# Altium PCB CAR2.PcbDoc
Units mil, origin at the board's own origin, x right, y up, seen from the top; angles counter-clockwise.
Board outline 1397.98 x 964.91 mil, 2 copper layers (Top Layer, Bottom Layer); 47 components, 33 nets, 165 pads, 35 vias.
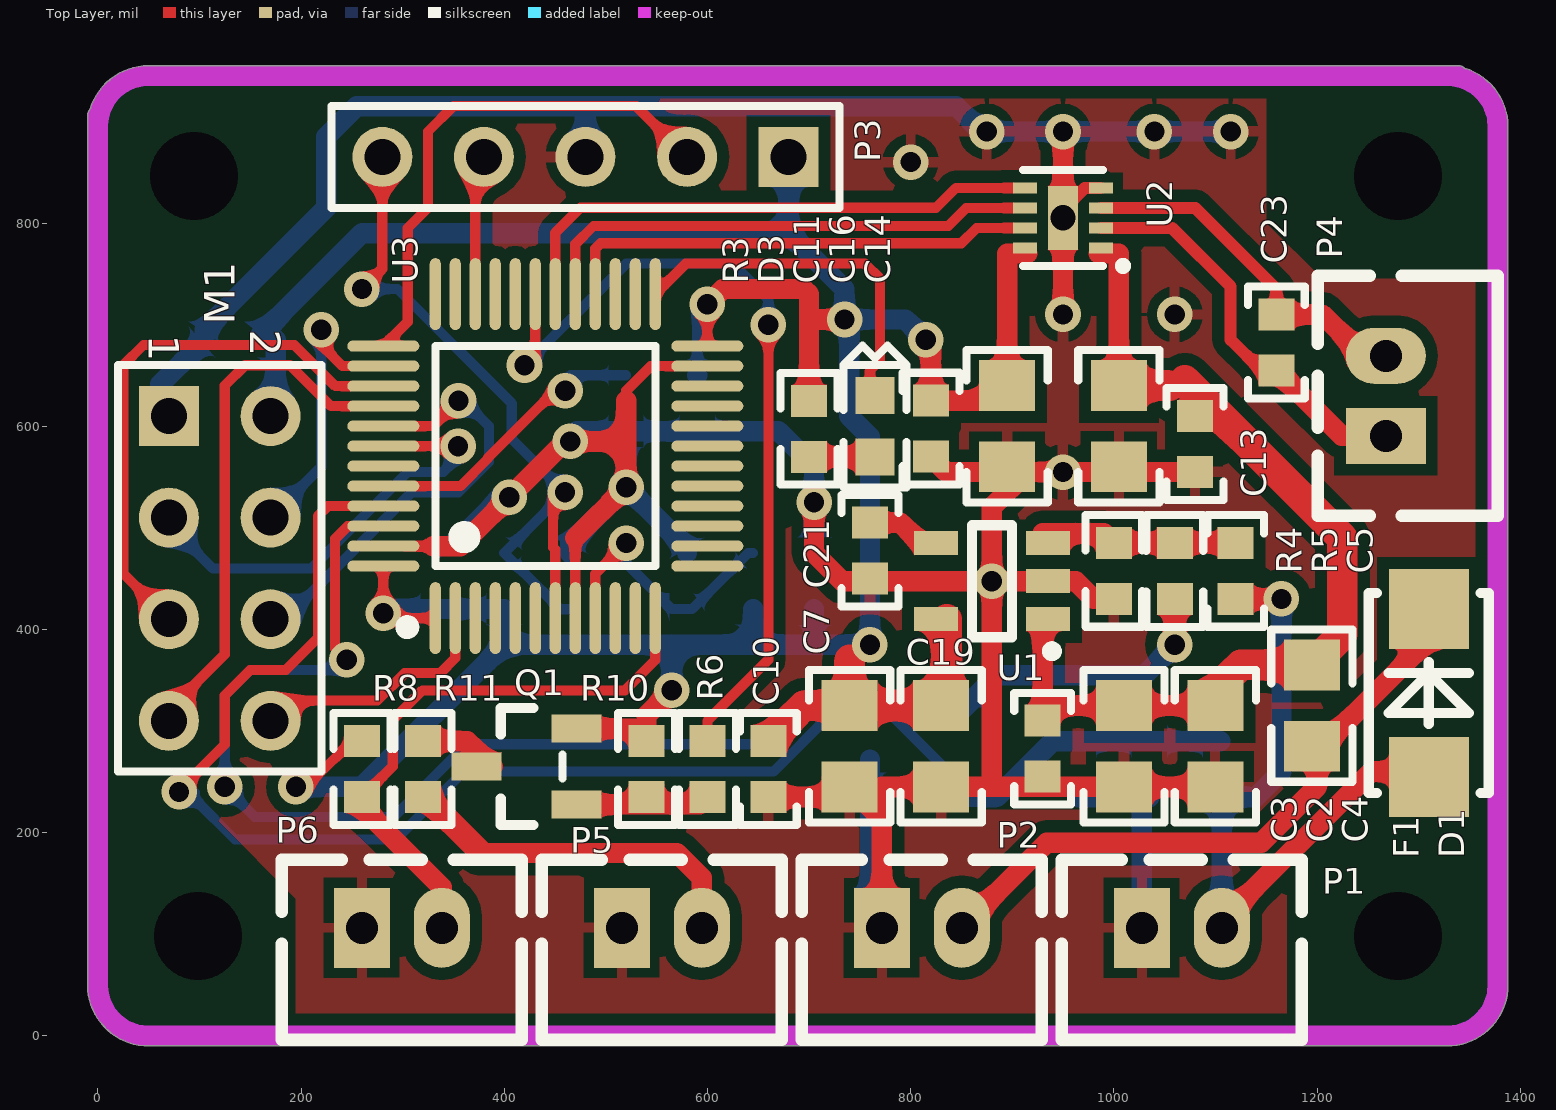
[diagram p0: Top Layer view]
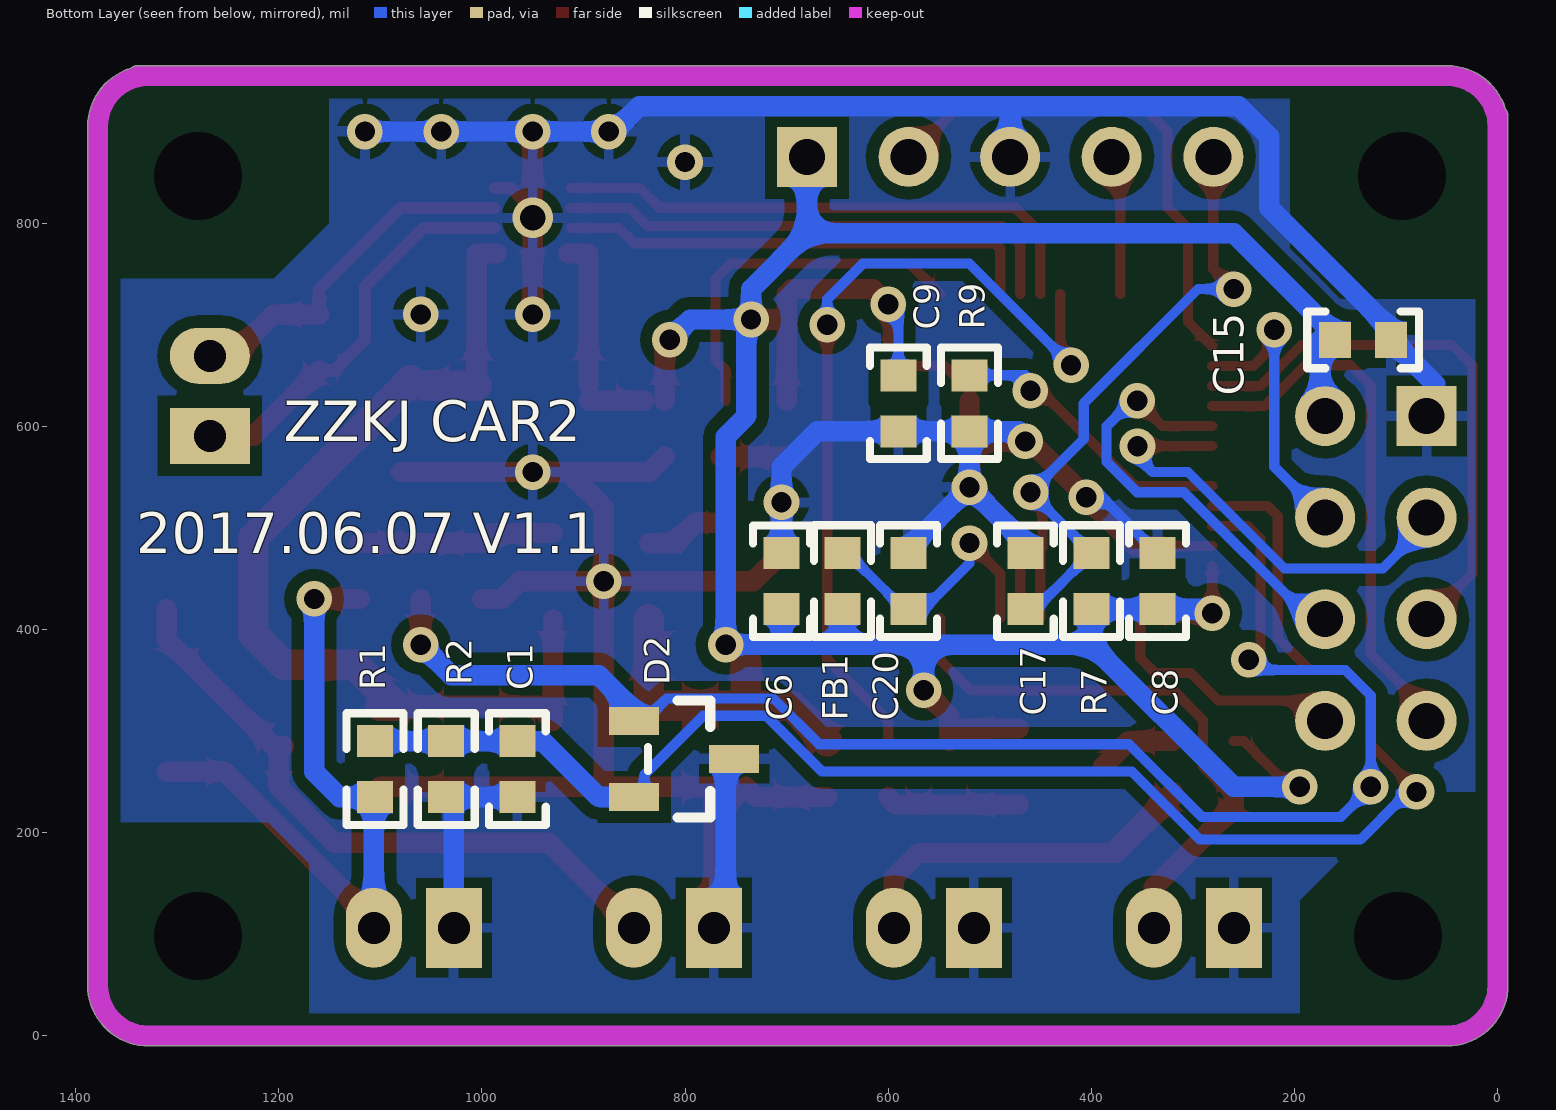
[diagram p1: Bottom Layer view, seen from below]

## Layer stack, top to bottom
Top Solder: solder mask 0.4, Solder Resist, Dk 3.5
Top Layer: signal copper 1.4
Dielectric 1: dielectric 12.6, FR-4, Dk 4.8
Bottom Layer: signal copper 1.4
Bottom Solder: solder mask 0.4, Solder Resist, Dk 3.5

## Board outline
-10.01,50 -10.01,905.51 cw(c0,905.51) -7.47,912.19 cw(c50,894.88) 50,954.9 1338.58,954.9 cw(c1338.58,944.88) 1345.26,952.35 cw(c1327.95,894.88) 1387.97,894.88 1387.97,50 cw(c1327.95,50) 1327.95,-10.01 50,-10.01 cw(c50,50)

## Design rules (kind name [scope] priority, off if disabled: settings)
Clearance Clearance_1 [InPolygon] p1: gap=12
Clearance [All] p2: gap=7
PolygonConnect [All] p1: connectstyle=Relief reliefconductorwidth=10 reliefentries=4 polygonreliefangle="90 Angle" airgapwidth=10
RoutingVias [All] p1: holewidth=22 width=40 viastyle="Through Hole" minholewidth=20 minwidth=30 maxholewidth=30 maxwidth=50
SilkToSolderMaskClearance [IsPad] p1: minsilkscreentomaskgap=4 clearancetoexposedcopper=TRUE
SolderMaskExpansion [All] p1: expansion=4
Width [All] p1: maxlimit=50 minlimit=10 preferedwidth=20 minimp=50.000000 maximp=50.000000 favimp=50.000000
29 further rules are at their usual default settings.

## Components (designator, comment, footprint, x,y, rotation, side; value= is the part's Value field where it differs from the comment)
C1 "100nF" C0603 965,234.88 r90 bottom
C2 "10uF" C0805 1010,285 r270 top
C3 "100nF" C0603 930,255 r90 top
C4 "10uF" C0805 1100,285 r270 top
C5 "100nF" C0603 1120,485.12 r270 top
C6 "100nF" C0603 705,419.88 r90 bottom
C7 "10uF" C0805 740,285 r270 top
C8 "100nF" C0603 335,475.12 r270 bottom
C9 "100nF" C0603 590,595 r90 bottom
C10 "100nF" C0603 660,290.12 r270 top
C11 "100nF" C0603 820,570 r90 top
C13 "100nF" C0603 1080,554.88 r90 top
C14 "10uF" C0805 1005,600 r90 top
C15 "100nF" C0603 105,685 r0 bottom
C16 "10uF" C0805 895,600 r90 top
C17 "100nF" C0603 465,475 r270 bottom
C19 "10uF" C0805 830,285 r90 top
C20 "100nF" C0603 580,475.12 r270 bottom
C21 "100nF" C0603 760,505 r270 top
C23 "100nF" C0603 1160,710 r270 top
D1 "SS14" LC-SMA(DO-214AC)_S2 1310,337.32 r270 top
D2 "PESD3V3L2BT" LC-SOT-23(SOT-23-3) 800.79,272.4 r0 bottom
D3 "LEDV1" LC-0603_LED_S4 765,600 r270 top
F1 "SMD0805-110" R0805 1195,325 r90 top
FB1 "GZ1608D601TF" R0603 645,420 r90 bottom
M1 "NRF2401" HDR2X4 70,610 r270 top
P1 "5V IN" PH-2Y 1027.56,106.3 r0 top
P2 "BAT" PH-2Y 771.65,106.3 r0 top
P3 "SWD" HDR1X5 680,865 r180 top
P4 "Motor" PH-2Y 1267.72,590.55 r90 top
P5 "TX" PH-2Y 515.75,106.3 r0 top
P6 "RX" PH-2Y 259.84,106.3 r0 top
Q1 "Si2301CDS" LC-SOT-23(SOT-23-3) 422.13,265 r0 top
R1 "10K" R0603 1105,290 r270 bottom
R2 "10K" R0603 1035,234.88 r90 bottom
R3 "1.5K" R0603 700,569.88 r90 top
R4 "100K" R0603 1000,430 r90 top
R5 "10K" R0603 1060,429.88 r90 top
R6 "1K" R0603 600,235 r90 top
R7 "100K" R0603 400,475.12 r270 bottom
R8 "100K" R0603 260,290.12 r270 top
R9 "10K" R0603 520,595 r90 bottom
R10 "100K" R0603 540,290.12 r270 top
R11 "100" R0603 320,290.12 r270 top
U1 "MIC5205-3.3YM5" LC-SOT-23-5 880,447.4 r0 top
U2 "DRV8837DSGR" "LC-WSON-8_2x2mm - DRV8837" 950,805 r90 top
U3 "STM32F051C8T6" LC-LQFP-48_7x7x05P 440.47,570.55 r0 top

## Footprints (in the part's own frame and the unit in brackets; to place one, negate y for a bottom-side part, rotate by r counter-clockwise, add the part's x,y. Pads: shape width x height; smd on the part's side, far side on the other; paste and mask are expansions set on the pad)
C0603 [mm] "Chip Capacitor, Body 1.6x0.8mm, IPC High Density"
  rect 0.8x0.9 smd: 1(0,0) 2(1.4,0)
  silkscreen extent -0.7,-0.71 2.1,0.71, body extent -0.18,-0.48 1.57,0.47, height 1.3
C0805 [mil] "Chip Capacitor, Body 2.0x1.3mm, IPC High Density"
  rect 50x55.12 smd: 1(-40,0) 2(40,0)
  silkscreen extent -75,-40 75,40, body extent -43,-30 43,30, height 55
HDR1X5 [mm] "Connector; Header; 5 Position"
  rect 1.5x1.5 hole 0.9: 1(0,0)
  round 1.5 hole 0.9: 2(2.54,0) 3(5.08,0) 4(7.62,0) 5(10.16,0)
  silkscreen extent -1.27,-1.27 11.43,1.27
HDR2X4 [mm] "Connector; Header; 4x2 Position"
  rect 1.5x1.5 hole 0.9: 1(0,0)
  round 1.5 hole 0.9: 2(0,2.54) 3(2.54,0) 4(2.54,2.54) 5(5.08,0) 6(5.08,2.54) 7(7.62,0) 8(7.62,2.54)
  silkscreen extent -1.27,-1.27 8.89,3.81
LC-0603_LED_S4 [mm]
  rect 0.93x0.98 smd: A(0.77,0) K(-0.77,0)
  silkscreen extent -2.01,-0.79 1.54,0.79, body extent -0.8,-0.4 0.8,0.4, height 0.6
LC-LQFP-48_7x7x05P [mm]
  oval 0.28x1.8 smd mask+0.051: 1(-2.75,-4.05) 2(-2.25,-4.05) 3(-1.75,-4.05) 4(-1.25,-4.05) 5(-0.75,-4.05) 6(-0.25,-4.05) 7(0.25,-4.05) 8(0.75,-4.05) 9(1.25,-4.05) 10(1.75,-4.05) 11(2.25,-4.05) 12(2.75,-4.05) 25(2.75,4.05) 26(2.25,4.05) 27(1.75,4.05) 28(1.25,4.05) 29(0.75,4.05) 30(0.25,4.05) 31(-0.25,4.05) 32(-0.75,4.05) 33(-1.25,4.05) 34(-1.75,4.05) 35(-2.25,4.05) 36(-2.75,4.05)
  oval 1.8x0.28 smd mask+0.051: 13(4.05,-2.75) 14(4.05,-2.25) 15(4.05,-1.75) 16(4.05,-1.25) 17(4.05,-0.75) 18(4.05,-0.25) 19(4.05,0.25) 20(4.05,0.75) 21(4.05,1.25) 22(4.05,1.75) 23(4.05,2.25) 24(4.05,2.75) 37(-4.05,2.75) 38(-4.05,2.25) 39(-4.05,1.75) 40(-4.05,1.25) 41(-4.05,0.75) 42(-4.05,0.25) 43(-4.05,-0.25) 44(-4.05,-0.75) 45(-4.05,-1.25) 46(-4.05,-1.75) 47(-4.05,-2.25) 48(-4.05,-2.75)
  silkscreen extent -3.6,-4.42 2.75,2.75
LC-SMA(DO-214AC)_S2 [mm]
  rect 2x2 smd: 1(2.1,0) 2(-2.1,0)
  silkscreen extent -2.5,-1.5 2.5,1.5
LC-SOT-23(SOT-23-3) [mm]
  rect 1.25x0.7 smd: 1(1.25,-0.95) 2(1.25,0.95) 3(-1.25,0)
  silkscreen extent -0.65,-1.46 0.9,1.46, body extent -1.5,-1.5 1.5,1.5, height 1.3
LC-SOT-23-5 [mm]
  rect 1.1x0.6 smd: 1(1.4,-0.95) 2(1.4,0) 3(1.4,0.95) 4(-1.4,0.95) 5(-1.4,-0.95)
  silkscreen extent -0.5,-1.87 1.63,1.4
"LC-WSON-8_2x2mm - DRV8837" [mm]
  rect 1.6x0.762 smd mask+0.051: 0(0,0)
  rect 0.28x0.6 smd mask+0.051: 1(-0.75,-0.95) 2(-0.25,-0.95) 3(0.25,-0.95) 4(0.75,-0.95) 5(0.75,0.95) 6(0.25,0.95) 7(-0.25,0.95) 8(-0.75,0.95)
  silkscreen extent -1.3,-1.6 1.2,1
PH-2Y [mm]
  rect 1.4x2 hole 0.8: 1(0,0)
  oval 1.4x2 hole 0.8: 2(2,0)
  silkscreen extent -2,-2.8 4,1.7
R0603 [mm] "Chip Capacitor, Body 1.6x0.8mm, IPC High Density"
  rect 0.8x0.9 smd: 1(0,0) 2(1.4,0)
  silkscreen extent -0.7,-0.71 2.1,0.71, body extent -0.18,-0.48 1.57,0.47, height 1.3
R0805 [mil] "Chip Capacitor, Body 2.0x1.3mm, IPC High Density"
  rect 50x55.12 smd: 1(-40,0) 2(40,0)
  silkscreen extent -75,-40 75,40, body extent -43,-30 43,30, height 55

## Part data
C1 C3 C5 C8 C9 C10 C11 C13 C14 C15 C16 C17 C19 C20 C21 C23: library part Cap, "Capacitor"
C2 C4 C6 C7: library part CAP, "Capacitor"
D1: library part DIODE, "Diode"
D2: library part ZENER2, "TVS"
D3: library part LED2, "Typical RED, GREEN, YELLOW, AMBER GaAs LED"
F1: library part "Fuse 2", "Fuse"
FB1: library part INDUCTOR1
P1 P2 P4 P5 P6: library part "Header 2", "Header, 2-Pin"
P3: library part "Header 5", "Header, 5-Pin"
Q1: library part BSH201, "P-channel Enhancement Mode MOSFET"
R1 R2 R3 R4 R5 R6 R7 R8 R9 R10 R11: library part Res2, "Resistor"
U1: library part MIC5205, "150mA Low-Noise LDO Regulator"
U2: library part DRV883x, "Low-Voltage H-Bridge Driver"
U3: library part STM32F51C8T6, "STM32 ARM-based 32-bit MCU with 64 Kbytes Flash, 48-pin LQFP, Industrial Temperature"

## Free pads (board coordinates)
  round 0 hole 86.61 unplated: 1(98.43,98.43) 2(94.49,846.46) 3(1279.53,846.46) 4(1279.53,98.43)

## Via types
v1: diameter 35, hole 20, Top Layer to Bottom Layer, tented both sides, 32 vias
v2: diameter 35, hole 20, Top Layer to Bottom Layer, 2 vias
v3: diameter 30/40 (per signal layer), hole 25, Top Layer to Bottom Layer, 1 vias

## Nets (pads, with @x,y where several pads share a name; then routed paths per layer and width w, separated by ;. In a path a pad name is that pad's centre, name@x,y a point inside that pad or via, vN(x,y) a via of type N, cw(c..) or ccw(c..) an arc to the next point about the centre after c; other vN are vias at no path point)
BOOT0: R9.2 U3.44 | length 290.6
  Top Layer w10: U3.44 356.96,541.02 384.11,568.17 384.11,569.11 450,635 v1(460,635)
  Bottom Layer w10: v1(460,635) 460,645 465.12,650.12 R9.2
GND: C1.1 C2.2 C3.1 C4.2 C6.2 C7.2 C8.1 C9.1 C10.2 C11.1 C13.1 C14.1 C15.1 C16.1 C17.1 C19.1 C20.1 C21.2 D2.3 M1.1 P1.1 P2.1 P3.3 P5.1 P6.1 R2.1 R4.1 R9.1 U1.2 U2.0 U2.4 U3.8 U3.23 U3.47 | length 4709.6
  Top Layer w10: U3.47 330,481.97 ; U3.8 470,490 ; 520,625 520,635 544.13,659.13 U3.23
  Top Layer w12: U2.0@950,813.15 971.38,834.53 U2.4
  Top Layer w20: 330,481.97 356.97,481.97 v1(405,530) v1@462.5,587.5 ; v1(465,585) 520,585 ; 470,490 v1(520,540) 520,585 ; 520,625 520,585 ; C10.2 730,235 C7.2 771.65,213.35 ; v1(705,525) 705,475 732.6,447.4 v2(880,447.4) ; P2.1 771.65,213.35 ; C11.1 835.12,554.88 C16.1@914.88,554.88 ; v1(950,710) v3(950,805) 950,813.15 v1(950,890) ; R4.1 980,430 962.6,447.4 v2(880,447.4) ; C13.1 v1(950,554.88) C16.1@914.88,554.88 ; C4.2 C2.2 880,245 ; 771.65,213.35 771.65,245 C19.1 880,245 ; 880,245 v2(880,447.4) ; v2(880,447.4) 880,520 C16.1@914.88,554.88
  Bottom Layer w10: C8.1 389.88,530 v1(405,530)
  Bottom Layer w20: M1.1@61.42,611.81 61.42,641.42 C15.1 105,695 225,815 225,885 255,915 485,915 ; C17.1 465,485 v1(520,540) ; v1@471.21,595 R9.1 C9.1 670,595 705,560 v1(705,525) C6.2 ; P3.3 480,910 485,915 ; R9.1@520,580 v1(520,540) ; C20.1 580,480 v1(520,540) ; D2.3@760,272 760,117.95 P2.1 ; C1.1 R2.1@1027.56,234.88 ; P1.1 R2.1@1027.56,234.88 ; R2.1 R2.1@1027.56,234.88 ; v1(1115,890) v1(1040,890) v1(950,890) v1(875,890) 870,890 845,915 485,915
  other v1: 1060,710 800,860
IR_RX: P6.2 R8.2 U3.12 | length 573.8
  Top Layer w10: R8.2 290.28,265.28 290.28,310.84 319.45,340 518.89,340 548.74,369.85 U3.12
  Top Layer w20: R8.2 260,225 338.58,146.42 P6.2
IR_RX2: 
IR_TX: R6.2 U3.31 | length 830.1
  Top Layer w10: v1(420,660) 430.63,670.63 U3.31 ; R6.2 600,310 660,370 v1(660,700)
  Bottom Layer w10: v1(420,660) 520,760 625,760 660,725 v1(660,700)
LED: D3.K U3.25 | length 363.9
  Top Layer w10: U3.25 578.74,760 755,760 770,745 770,665 760,655 D3.K@760,625.12
MIN1: U2.6 U3.29 | length 506.5
  Top Layer w10: U3.29 470,779.04 487.96,797 837,797 854.84,814.84 U2.6
MIN2: U2.5 U3.30 | length 540.9
  Top Layer w10: U3.30 450.31,790.31 475,815 825,815 844.53,834.53 U2.5
MNSLEEP: U2.7 U3.28 | length 476.1
  Top Layer w10: U3.28 489.68,774.68 495,780 850,780 865.16,795.16 U2.7
NetC5_1: C5.1 R4.2 R5.2 U1.3 | length 194
  Top Layer w20: U1.3@930,494.8 990.32,494.8 R4.2 C5.1
NetC5_2: C5.2 D1.1 P1.2 R1.2 | length 685.9
  Top Layer w20: P1.2 1106.3,113.12 1253.18,260 D1.1@1310,260 ; C5.2 v2(1165,430)
  Bottom Layer w20: P1.2 1106.3,233.58 R1.2 1139.88,234.88 1165,260 v2(1165,430)
NetC20_2: C20.2 FB1.2 U3.9 | length 272.9
  Top Layer w10: U3.9 489.68,454.68 v1(520,485)
  Bottom Layer w10: v1(520,485) 520,465 565,420 C20.2 585,420 640.12,475.12 FB1.2
NetC21_1: C21.1 U1.4 | length 84.3
  Top Layer w20: C21.1 789.8,505 810,484.8 835.51,484.8 U1.4@835.2,485.12
NetC23_1: C23.1 P4.2 U2.3 | length 355.2
  Top Layer w12: U2.3 1080.16,814.84 1160,735 C23.1
  Top Layer w20: C23.1 1205,710 1245.71,669.29 P4.2
NetC23_2: C23.2 P4.1 U2.2 | length 395.8
  Top Layer w12: U2.2 1057.34,795.16 1115,737.5 1115,685 1145.12,654.88 C23.2
  Top Layer w20: C23.2 1224.33,590.55 P4.1
NetD3_A: D3.A R3.1 | length 65.1
  Top Layer w20: R3.1 764.8,569.88 D3.A
NetP5_2: P5.2 R11.2 | length 441.5
  Top Layer w20: R11.2 375,180 380,180 ; R11.2@320,240 380,180 ; P5.2 594.49,155.51 570,180 380,180
NetQ1_1: Q1.1 R6.1 R10.2 | length 131.7
  Top Layer w20: Q1.1 592.6,227.6 R6.1
NetQ1_3: Q1.3 R11.1 | length 79.1
  Top Layer w20: R11.1 363.54,290.12 Q1.3@388.66,265
NRST: C17.2 P3.5 R7.1 U3.7 | length 743.9
  Top Layer w10: v1(260,735) 280,755 P3.5 ; U3.7 450.31,478.57 448,480.89 448,523.12 v1(459.88,535)
  Bottom Layer w10: v1(260,735) 295,735 407.5,622.5 407.5,587.38 v1(459.88,535) R7.1 455.24,419.88 C17.2
PWR: D2.1 R5.1 U3.46 | length 1481.7
  Top Layer w10: v1(245,370) 233.59,381.41 233.59,489.39 245.86,501.65 U3.46
  Top Layer w20: v1(1060,385) R5.1
  Bottom Layer w10: v1(245,370) 235,360 150,360 125,335 v1(125,245) 154.5,215.5 291.46,215.5 362.96,287 667.96,287 712.96,332 818,332 D2.1@840,310
  Bottom Layer w20: D2.1@840,310 885,355 1030,355 v1(1060,385)
RF_CE: M1.3 U3.42 | length 444.4
  Top Layer w10: U3.42 v1(354.61,580.39)
  Bottom Layer w10: M1.3@61.42,511.81 113.23,460 210,460 305,555 340,555 354.61,569.61 v1(354.61,580.39)
RF_IRQ: M1.8 U3.2 | length 255
  Top Layer w10: M1.8 167.66,310 165.85,311.81 184.04,330 275,330 302,357 337,357 351.89,371.89 U3.2
SPI1_MISO: M1.7 U3.40 | length 535.5
  Top Layer w10: M1.7@61.42,311.81 125,375.39 125,640 145,660 189.24,660 229.48,619.76 U3.40
SPI1_MOSI: M1.6 U3.41 | length 439.6
  Top Layer w10: U3.41 330.08,600.08 v1@350,620
  Bottom Layer w10: M1.6@161.42,411.81 185.85,411.81 309.04,535 355,535 385,565 385,600 360,625 v1(355,625)
SPI1_NSS: M1.4 U3.38 | length 290.4
  Top Layer w10: v1(220,695) 220,680 240.87,659.13 U3.38
  Bottom Layer w10: M1.4 220,560 v1(220,695)
SPI1_SCK: M1.5 U3.39 | length 554.5
  Top Layer w10: M1.5@61.42,411.81 M1.5@64.8,415.2 ; M1.5 M1.5@64.8,415.2 ; U3.39 233.83,639.45 193.28,680 45,680 25,660 25,455 M1.5@64.8,415.2
SWCLK: P3.2 U3.37 | length 515.5
  Top Layer w10: U3.37 305,702.8 305,795 325,815 325,890 350,915 530,915 P3.2
SWDIO: P3.4 U3.34 | length 138.5
  Top Layer w10: U3.34 371.57,856.57 P3.4
VBAT: D1.2 F1.1 P2.2 | length 635.6
  Top Layer w20: P2.2 934.09,190 1145,190 1200,245 F1.1@1200,285 ; F1.1 F1.1@1200,285 ; D1.2 1310,390 1205,285 F1.1@1200,285
VBUS: C1.2 D2.2 R1.1 R2.2 U3.45 | length 1567.2
  Top Layer w10: v1@80,241.72 125,286.72 125,335 150,360 185,360 216.59,391.59 216.59,511.59 226.34,521.34 U3.45
  Bottom Layer w10: v1@95.5,239.5 95.5,232.78 135,193.28 293.28,193.28 360,260 665,260 720,315 782.03,315 840,257.03 D2.2@840,235
  Bottom Layer w20: D2.2@840,235 D2.2 885,235 940,290 C1.2 R2.2 R1.1
  other v1: 80,240
VCC3.3: C6.1 C7.1 C8.2 C9.2 C10.1 C11.2 C15.2 C16.2 C19.2 FB1.1 M1.2 P3.1 Q1.2 R3.2 R7.2 R8.1 R10.1 U1.5 U2.8 U3.1 U3.24 U3.48 | length 3431.8
  Top Layer w10: v1@195,235 250.12,290.12 R8.1 ; U3.48 v1(281.02,416.02) 285.94,411.1 U3.1 ; U3.24 v1(599.92,719.92)
  Top Layer w20: Q1.2 527.72,302.4 R10.1 540,315 v1(565,340) ; v1(599.92,719.92) 615,735 695,735 700,730 700,700 ; R3.2 700,700 ; v1(735,705) 705,705 700,700 ; v1(815,685) 820,680 C11.2 ; 840,625.12 C16.2@895,625.12 ; C16.2 895,770 U2.8@915,770
  Top Layer w30: C10.1 694.88,325 C7.1 ; 740,370 C7.1 ; U1.5@835.51,410 835.51,330.51 C19.2 C7.1
  Bottom Layer w10: C9.2 590,710 v1(599.92,719.92)
  Bottom Layer w20: C15.2 160.12,690.12 260,790 680,790 ; M1.2@173.23,600 161.42,611.81 175,625.39 C15.2@175,685 ; v1(195,245) 260,245 400,385 ; v1(281.02,416.02) 285,420 C8.2 R7.2 396.02,416.02 400,412.05 400,385 ; v1(565,340) 565,385 ; C9.2 C9.2@590.12,650 ; FB1.1 645,385 ; P3.1 680,790 ; C6.1 705,387.5 702.5,385 ; v1(815,685) 795,705 v1(735,705) ; 400,385 565,385 ; 565,385 645,385 ; 645,385 702.5,385 ; 680,790 735,735 v1(735,705) ; 702.5,385 v1(760,385) 760,589.72 739.72,610 739.72,700.28 v1(735,705)
VIN: C2.1 C3.2 C4.1 C13.2 C14.2 F1.2 U1.1 U2.1 | length 959.2
  Top Layer w20: U1.1@930,410 C3.2 944.88,325 C2.1 C4.1@1085,325 ; U2.1@985,770 1005,770 C14.2
  Top Layer w30: C14.2 1055,640 ; 1070,645 1225,490 1225,395 F1.2 1125,365 1085,325 C4.1
pads on no net: U3.3 U3.4 U3.5 U3.6 U3.10 U3.11 U3.13 U3.14 U3.15 U3.16 U3.17 U3.18 U3.19 U3.20 U3.21 U3.22 U3.26 U3.27 U3.32 U3.33 U3.35 U3.36 U3.43

## Polygon pours and split planes (outlines as drawn)
GND on Bottom Layer "GND_L02_P006" (solid, remove dead copper, pour order 6): 1150,944.88 1150,800 1205,745 1380,745 1380,212.05 1377.95,210 1210,210 1175,175 1170,170 1170,0 195,0 195,133.28 160.28,168 88.28,240 0,240 0,690 0,715 0,725 155,725 175,745 205,775 205,944.88
GND on Top Layer "GND_L01_P008" (solid, remove dead copper, pour order 8): 1150,944.88 1150,800 1205,745 1377.95,745 1377.95,210 1195,210 1170,185 1170,0 195,0 195,135 90,240 0,240 0,725 120,725 205,810 205,944.88

## Keep-outs
Keep-Out Layer:
  lines w20: 0,894.88 cw(c50,894.88) 50,944.88 1338.58,944.88 ; 0,905.51 0,50 ccw(c50,50) 50,0 1327.95,0 ccw(c1327.95,50) 1377.95,50 1377.95,894.88 ccw(c1327.95,894.88) 1327.95,944.88

## Silkscreen, mask and mechanical layers (free items; w line width, h text height)
Bottom Overlay:
  text "ZZKJ CAR2" at 1195,585 h40
  text "2017.06.07 V1.1" at 1340,475 h40
Drill Drawing:
  text ".Legend" at -40,1240 h50

## Text inside footprints (layer, text, board x,y; h text height)
M1: Top Overlay "2" at 150,695 h30 r270; Top Overlay "1" at 50,690 h30 r270